# Altium PCB RGB LED.PcbDoc
Units mm, origin at the board's own origin, x right, y up, seen from the top; angles counter-clockwise.
Board outline 28.58 x 28.58 mm, 2 copper layers (Top Layer, Bottom Layer), stack 1.569 mm thick; 8 components, 6 nets, 20 pads, 5 vias.
Unrouted connection lines stored in the file: 7.
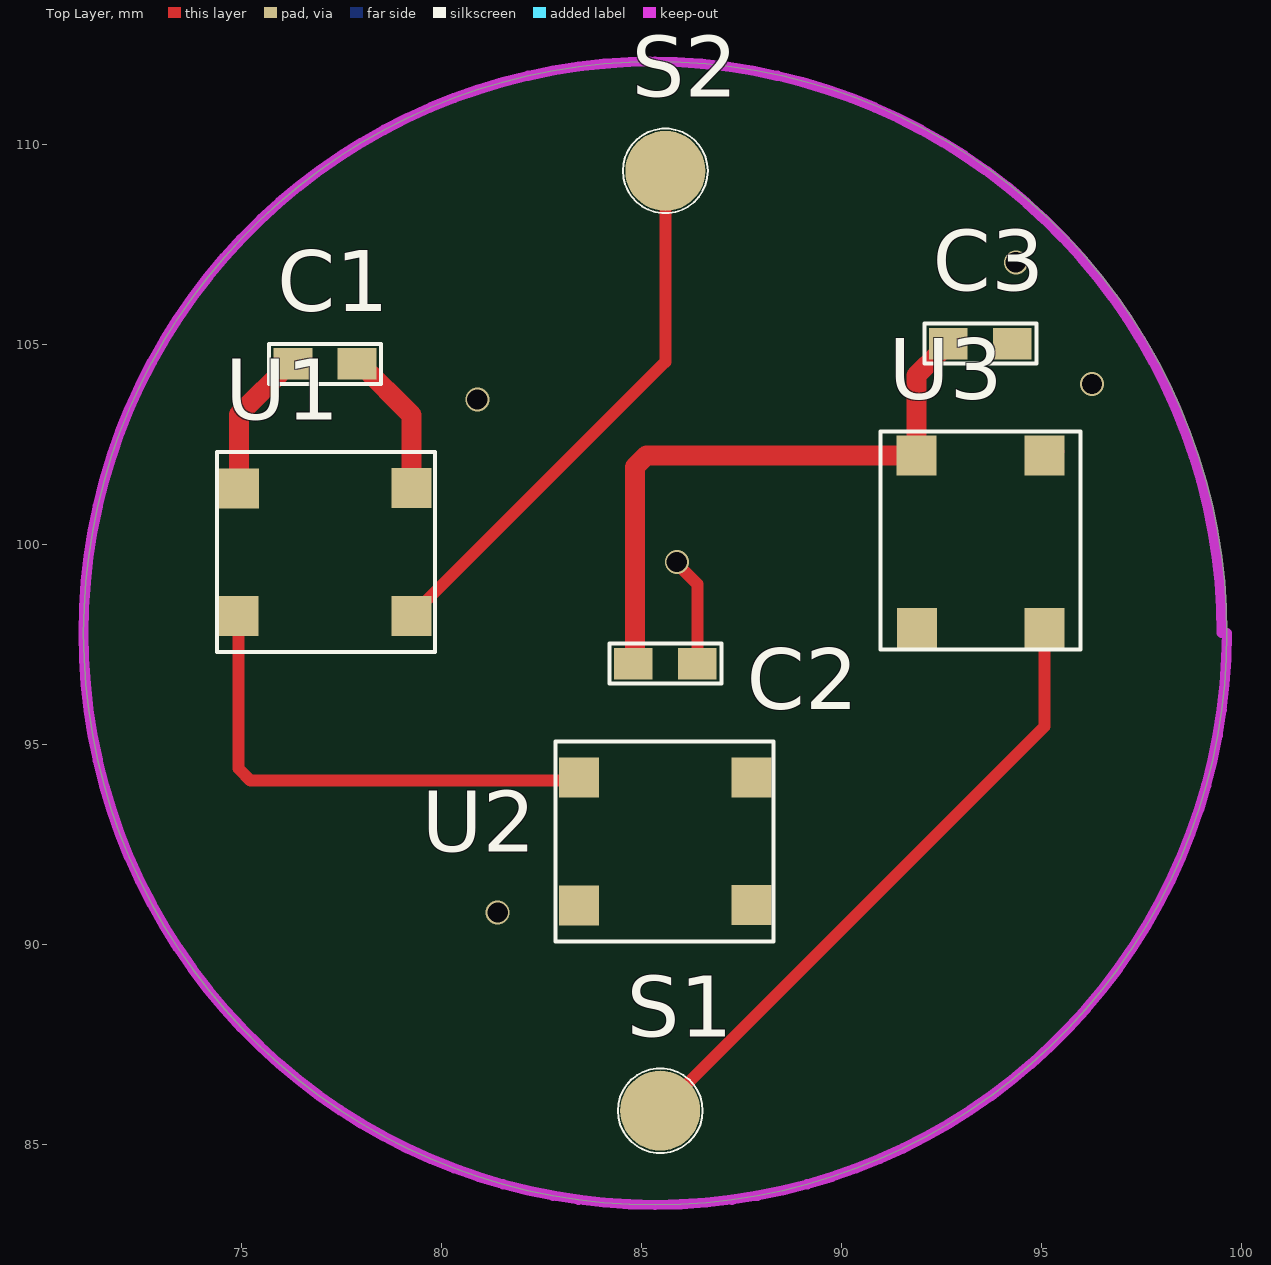
[diagram p0: Top Layer view]
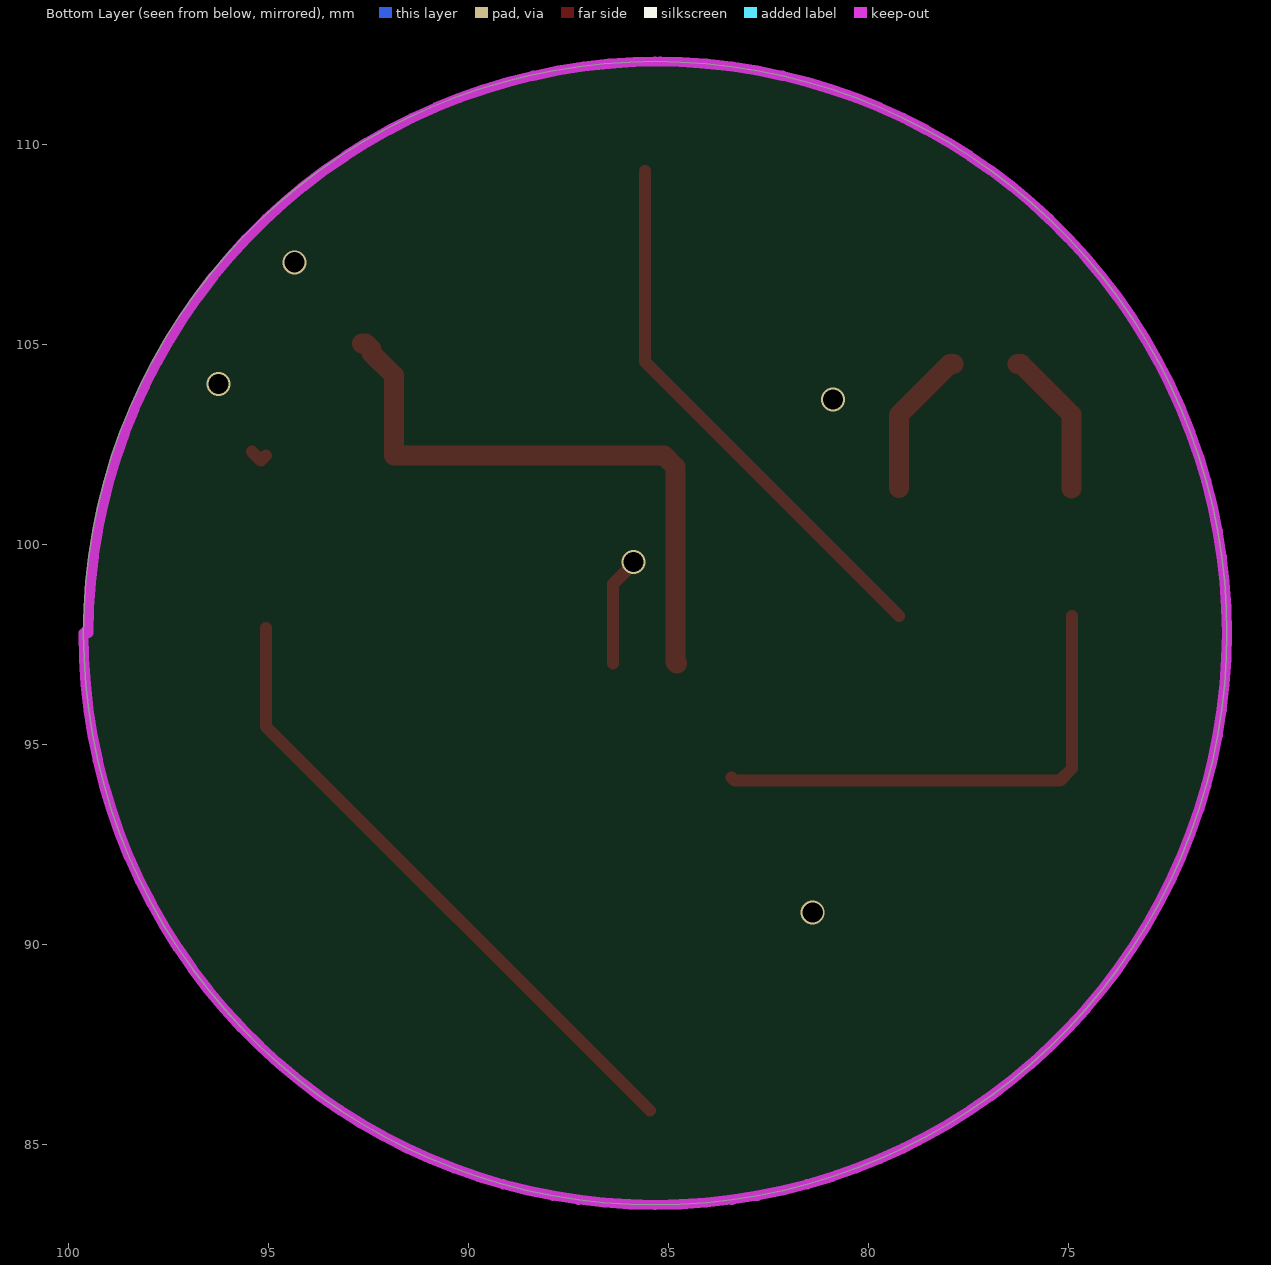
[diagram p1: Bottom Layer view, seen from below]
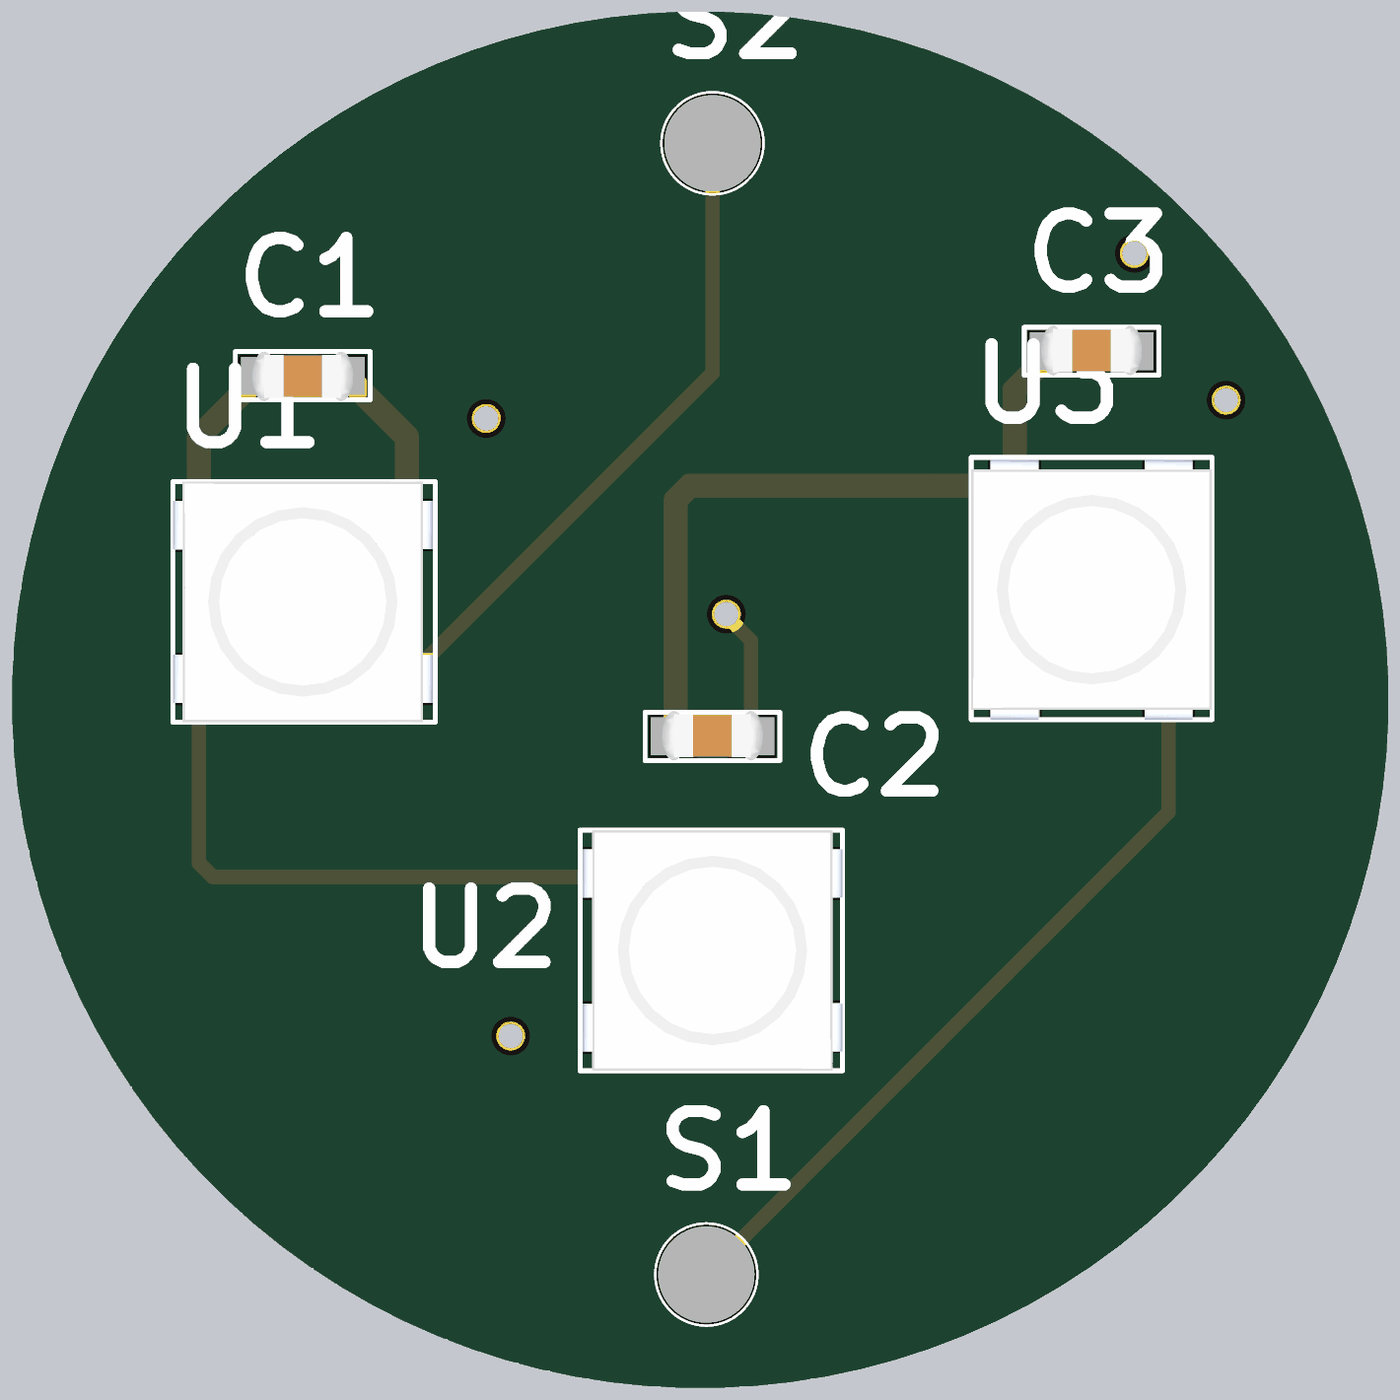
[diagram p2: 3D render of the assembled board from above, using the file's embedded part models]

## Layer stack, top to bottom
Top Solder: solder mask 0.0254, SM-001, Dk 4
Top Layer: signal copper 0.035
Dielectric 1: core 1.4986, Core-043, Dk 4.3
Bottom Layer: signal copper 0.035
Bottom Solder: solder mask 0.0254, SM-001, Dk 4

## Board outline
85.344,83.498 cw(c85.344,97.79) 71.052,97.79 cw(c85.344,97.79) 85.344,112.082 cw(c85.344,97.79) 99.636,97.79 cw(c85.344,97.79)

## Design rules (kind name [scope] priority, off if disabled: settings)
Clearance [All] p1: gap=0.254 ignorepadtopadclearanceinfootprint=FALSE except(0.4: Arc-Via Track-Via SMDPad-Via THPad-Via Via-Via)
PolygonConnect [All] p1: connectstyle=Relief reliefconductorwidth=0.254 reliefentries=4 polygonreliefangle="90 Angle" airgapwidth=0.254
RoutingVias [All] p1: holewidth=0.711 width=1.27 viastyle="Through Hole" minholewidth=0.2 minwidth=0.2 maxholewidth=0.4 maxwidth=0.4
SolderMaskExpansion [All] p1: expansion=0.102 istentingtop=FALSE
SupplyNets "Schematic Supply Nets_1" [InNet('GND')] p1: voltage=0.000
SupplyNets "Schematic Supply Nets" [InNet('+5')] p2: voltage=0.000
Width [All] p1: maxlimit=2 minlimit=0.254 preferedwidth=0.254 minimp=50.000000 maximp=50.000000 favimp=50.000000
30 further rules are at their usual default settings.

## Components (designator, comment, footprint, x,y, rotation, side; value= is the part's Value field where it differs from the comment)
C1 "CL10C200JB8NNNC" CAP_0603 77.089,104.521 r180 top
C2 "CL10C200JB8NNNC" CAP_0603 85.598,97.028 r0 top
C3 "CL10C200JB8NNNC" CAP_0603 93.472,105.029 r0 top
S1 "RGBsolderpad" Solderpad0 85.471,85.852 r0 top
S2 "RGBsolderpad" Solderpad0 85.598,109.347 r0 top
U1 "RGB" "RGB LED 1655" 77.089,99.822 r180 top
U2 "RGB" "RGB LED 1655" 85.598,92.583 r0 top
U3 "RGB" "RGB LED 1655" 93.472,100.076 r270 top

## Footprints (in the part's own frame and the unit in brackets; to place one, negate y for a bottom-side part, rotate by r counter-clockwise, add the part's x,y. Pads: shape width x height; smd on the part's side, far side on the other; paste and mask are expansions set on the pad)
CAP_0603 [mil]
  rect 38x31 smd mask+1.97: 1(-31.5,0) 2(31.5,0)
  silkscreen extent -55,-20 55,20, body extent -41,-20 41,21, height 31
"RGB LED 1655" [mm]
  rect 1x1 smd mask+0.05: 1(-2.16,1.6) 2(-2.16,-1.6) 3(2.16,1.6) 4(2.154,-1.584)
  silkscreen extent -2.75,-2.5 2.7,2.5, body extent -2.7,-2.5 2.7,2.5, height 1.58
Solderpad0 [mm]
  round 2 smd mask+0.05: 1(0,0)
  silkscreen extent -1.06,-1.06 1.06,1.06

## Part data
C1 C2 C3: library part "CAP CER 20pF 0603", "CAP CER 20pF %5 0603 SMD", Capacitance=20pF, Case Code (Metric)=1608, Case Code (Imperial)=0603, Dielectric=C0G, Manufacturer=Samsung, Max Operating Temperature=125°C, Min Operating Temperature=-55°C, Package Quantity=1, Supplier Part Number 1=1276-1187-1-ND, Temperature Coefficient=300ppm/°C, Tolerance=5%, Voltage=50V, Case/Package=0603, Category="Ceramic Capacitors", ComponentLink1Description=https://datasheet.ciiva.com/26877/getdatasheetpartid-640634-26877974.pdf?src-supplier=Verical, ComponentLink1URL=https://datasheet.ciiva.com/26877/getdatasheetpartid-640634-26877974.pdf?src-supplier=Verical, ComponentLink2Description=https://datasheet.ciiva.com/26310/mlcc-catalogdownload2013-eng-26310315.pdf?src-supplier=Distrelec, ComponentLink2URL=https://datasheet.ciiva.com/26310/mlcc-catalogdownload2013-eng-26310315.pdf?src-supplier=Distrelec, Construction=Flat, Depth=0.8mm, Designed by=BERK, Height=0.8mm, Length=1.6mm, Manufacturer Part Number=CL10C200JB8NNNC, Mount="Surface Mount", Packaging="Tape and Reel", Pricing 1="1=0,10000, 10=0,04700, 50=0,02560, 100=0,02090, 500=0,01490, 1000=0,01171 (USD)", Radiation Hardening=No, RoHS=Yes, RoHS Compliant=Yes, Series=CL, Stock 1=765558, Supplier 1=Digi-Key, Thickness=0.035inch, Voltage Rating=50V, Width=0.031inch
S1 S2: "SOLDER PAD"
U1 U2 U3: library part "RGB LED 1655", "Neopixel 5050 RGB LED with Integrated Driver Chip - 10 Pack", Color="Blue, Green, Red", Manufacturer="Adafruit Industries", Manufacturer Part Number=1655, Max Operating Temperature=85°C, Min Operating Temperature=-40°C, Supplier Part Number=485-1655, Category=LEDs, ComponentLink1Description=https://datasheet.octopart.com:443/1655-Adafruit-Industries-datasheet-130000511.pdf?src-supplier=Upverter, ComponentLink1URL=https://datasheet.octopart.com:443/1655-Adafruit-Industries-datasheet-130000511.pdf?src-supplier=Upverter, ComponentLink2Description=https://datasheet.octopart.com/ADA1655-Adafruit-Industries-datasheet-32028139.pdf, ComponentLink2URL=https://datasheet.octopart.com/ADA1655-Adafruit-Industries-datasheet-32028139.pdf, Height=1.6mm, Length=5mm, Mounting Technology="Surface Mount", Number of LEDs=10, Pricing="1=4,5, 10=4,5, 50=4,5, 100=4,5, 1000=4,5, 10000=4,5 (USD)", RoHS=Compliant, Schedule B="8541402000, 8542310000, 8542310000|8542310000|8542310000|8542310000|8542310000", Stock=1926, Supplier=Mouser, Width=5mm

## Via types
v1: diameter 0.6, hole 0.508, Top Layer to Bottom Layer, 4 vias
v2: diameter 0.6, hole 0.5, Top Layer to Bottom Layer, 1 vias

## Nets (pads, with @x,y where several pads share a name; then routed paths per layer and width w, separated by ;. In a path a pad name is that pad's centre, name@x,y a point inside that pad or via, vN(x,y) a via of type N, cw(c..) or ccw(c..) an arc to the next point about the centre after c; other vN are vias at no path point)
+5: C1.1 C2.1 C3.1 U1.2 U2.2 U3.2 | length 19
  Top Layer w0.5: C1.1 77.978,104.521 79.249,103.25 U1.2 ; C2.1 84.836,97.066 84.836,101.943 85.129,102.236 U3.2 91.872,104.229 92.439,104.796 92.439,104.885 92.583,105.029 C3.1
GND: C1.2 C2.2 C3.2 U1.4 U2.4 U3.4 | length 6.5
  Top Layer w0.3: v1(85.886,99.568) 85.886,99.532 86.398,99.019 C2.2
  Top Layer w0.5: U1.4 74.935,103.256 76.2,104.521 C1.2
NetS1_1: S1.1 U3.3 | length 16
  Top Layer w0.3: S1.1 95.072,95.453 U3.3
NetS2_1: S2.1 U1.1 | length 13.8
  Top Layer w0.3: U1.1 85.598,104.571 S2.1
NetU1_3: U1.3 U2.1 | length 12.5
  Top Layer w0.3: U1.3 74.929,94.401 75.222,94.108 83.363,94.108 U2.1
NetU2_3: U2.3 U3.1 | length 0.5
  Top Layer w0.3: U3.1 95.2,102.108 U3.1@95.422,102.33
copper on no net:
  other v1: 81.407,90.805 80.899,103.632 94.361,107.061
  other v2: 96.266,104.013

## Keep-outs
Keep-Out Layer:
  lines w0.254: 85.217,112.082 cw(c85.217,97.79) 99.509,97.79 ; 85.344,112.082 ccw(c85.344,97.79) 71.052,97.79 ccw(c85.344,97.79) 85.344,83.498 ccw(c85.344,97.79) 99.636,97.79

## Silkscreen, mask and mechanical layers (free items; w line width, h text height)
Drill Guide:
  circle w0.05: c85.217,97.79 r14.292